# Altium PCB Current Sensor.PcbDoc
Units mil, origin at the board's own origin, x right, y up, seen from the top; angles counter-clockwise.
Board outline 1655 x 1211.8 mil, 4 copper layers (Top Layer, GND, 5V, Bottom Layer), stack 26.556 mil thick; 30 components, 11 nets, 69 pads, 59 vias.
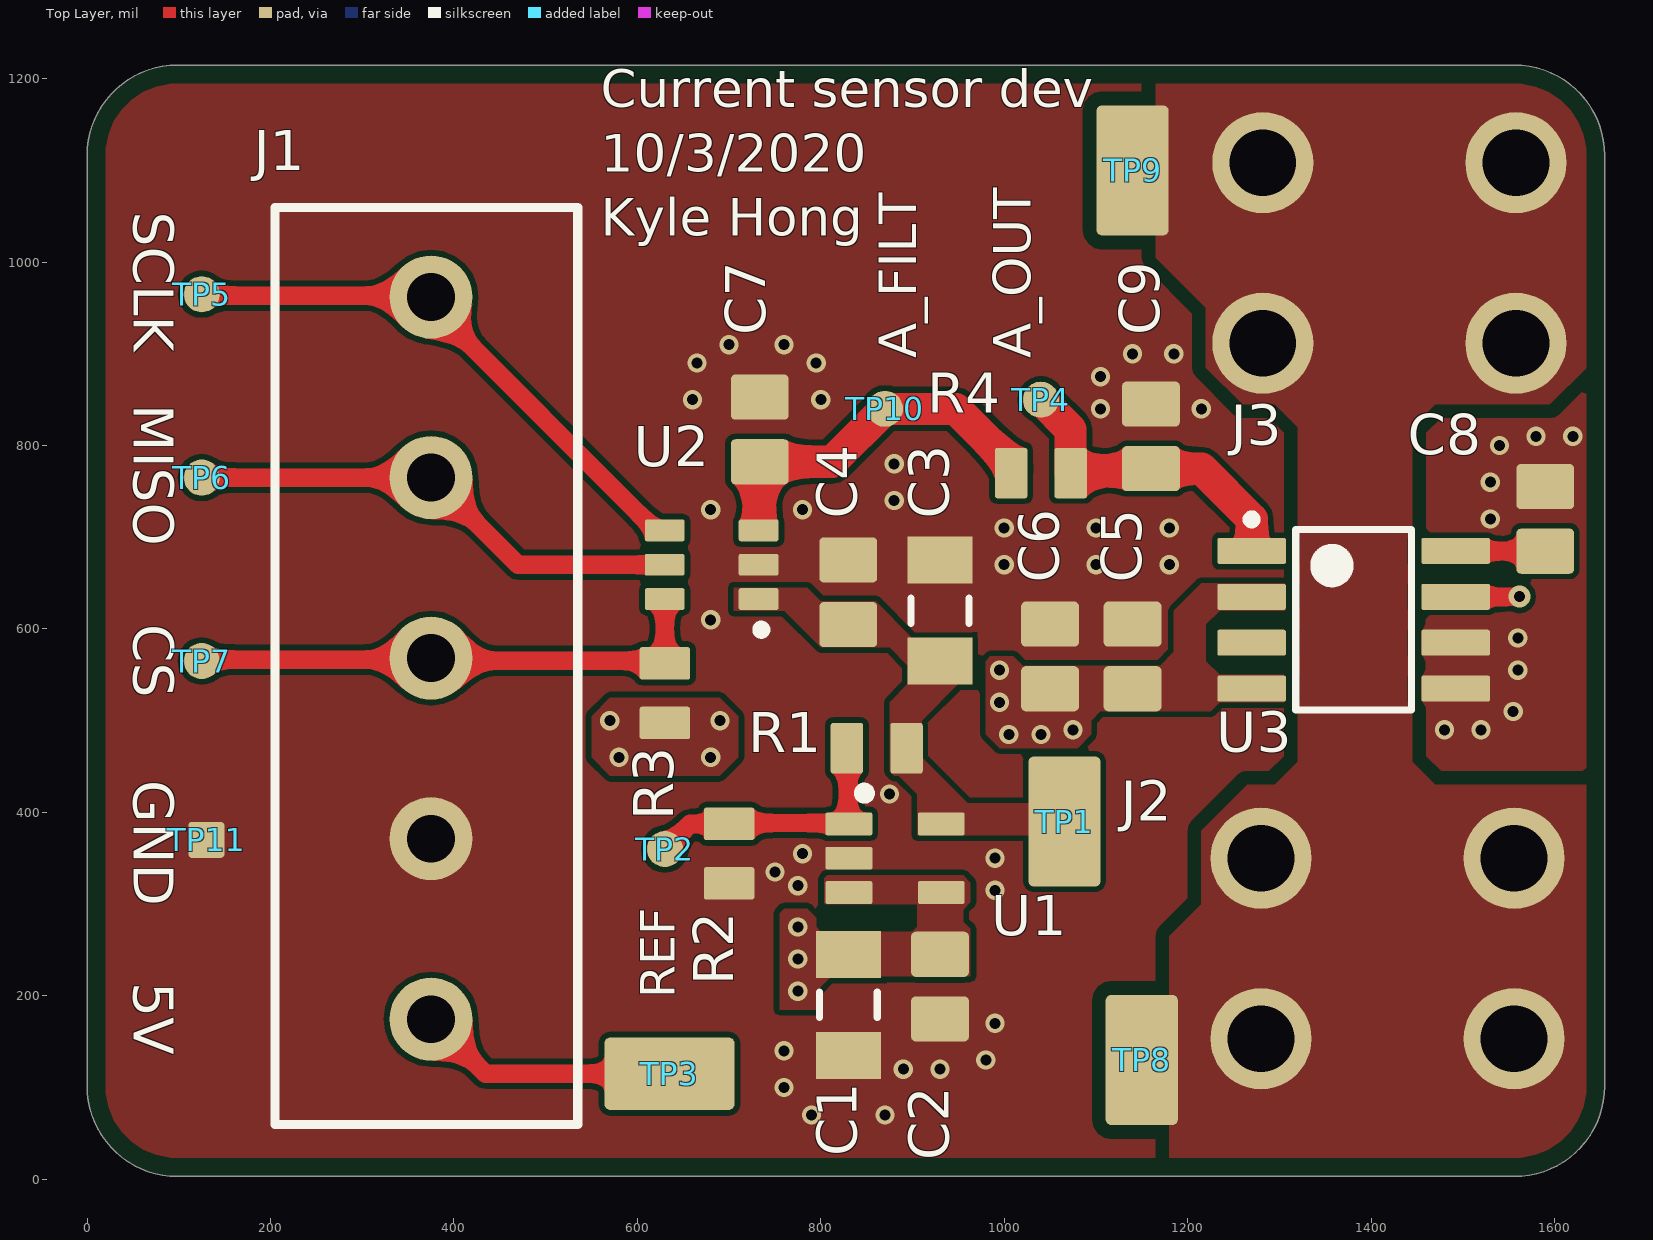
[diagram p0: Top Layer view]
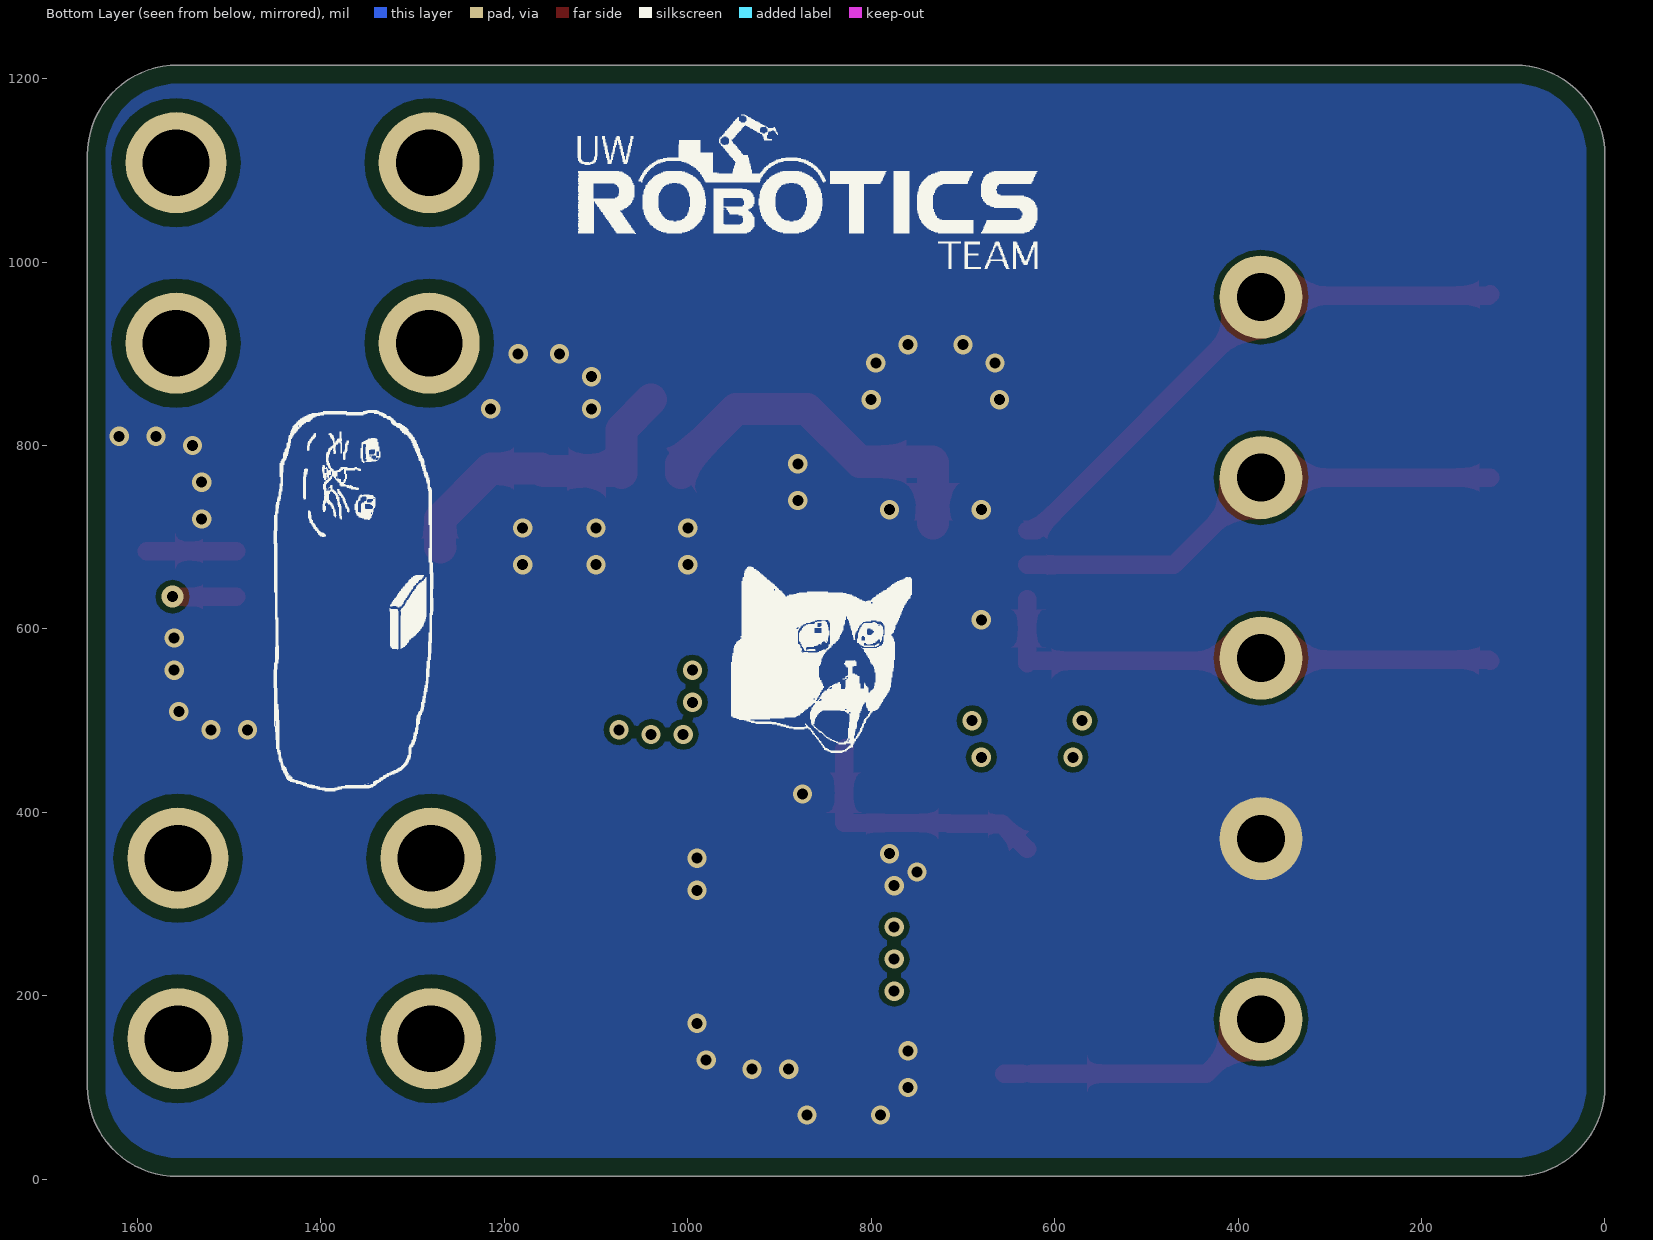
[diagram p1: Bottom Layer view, seen from below]
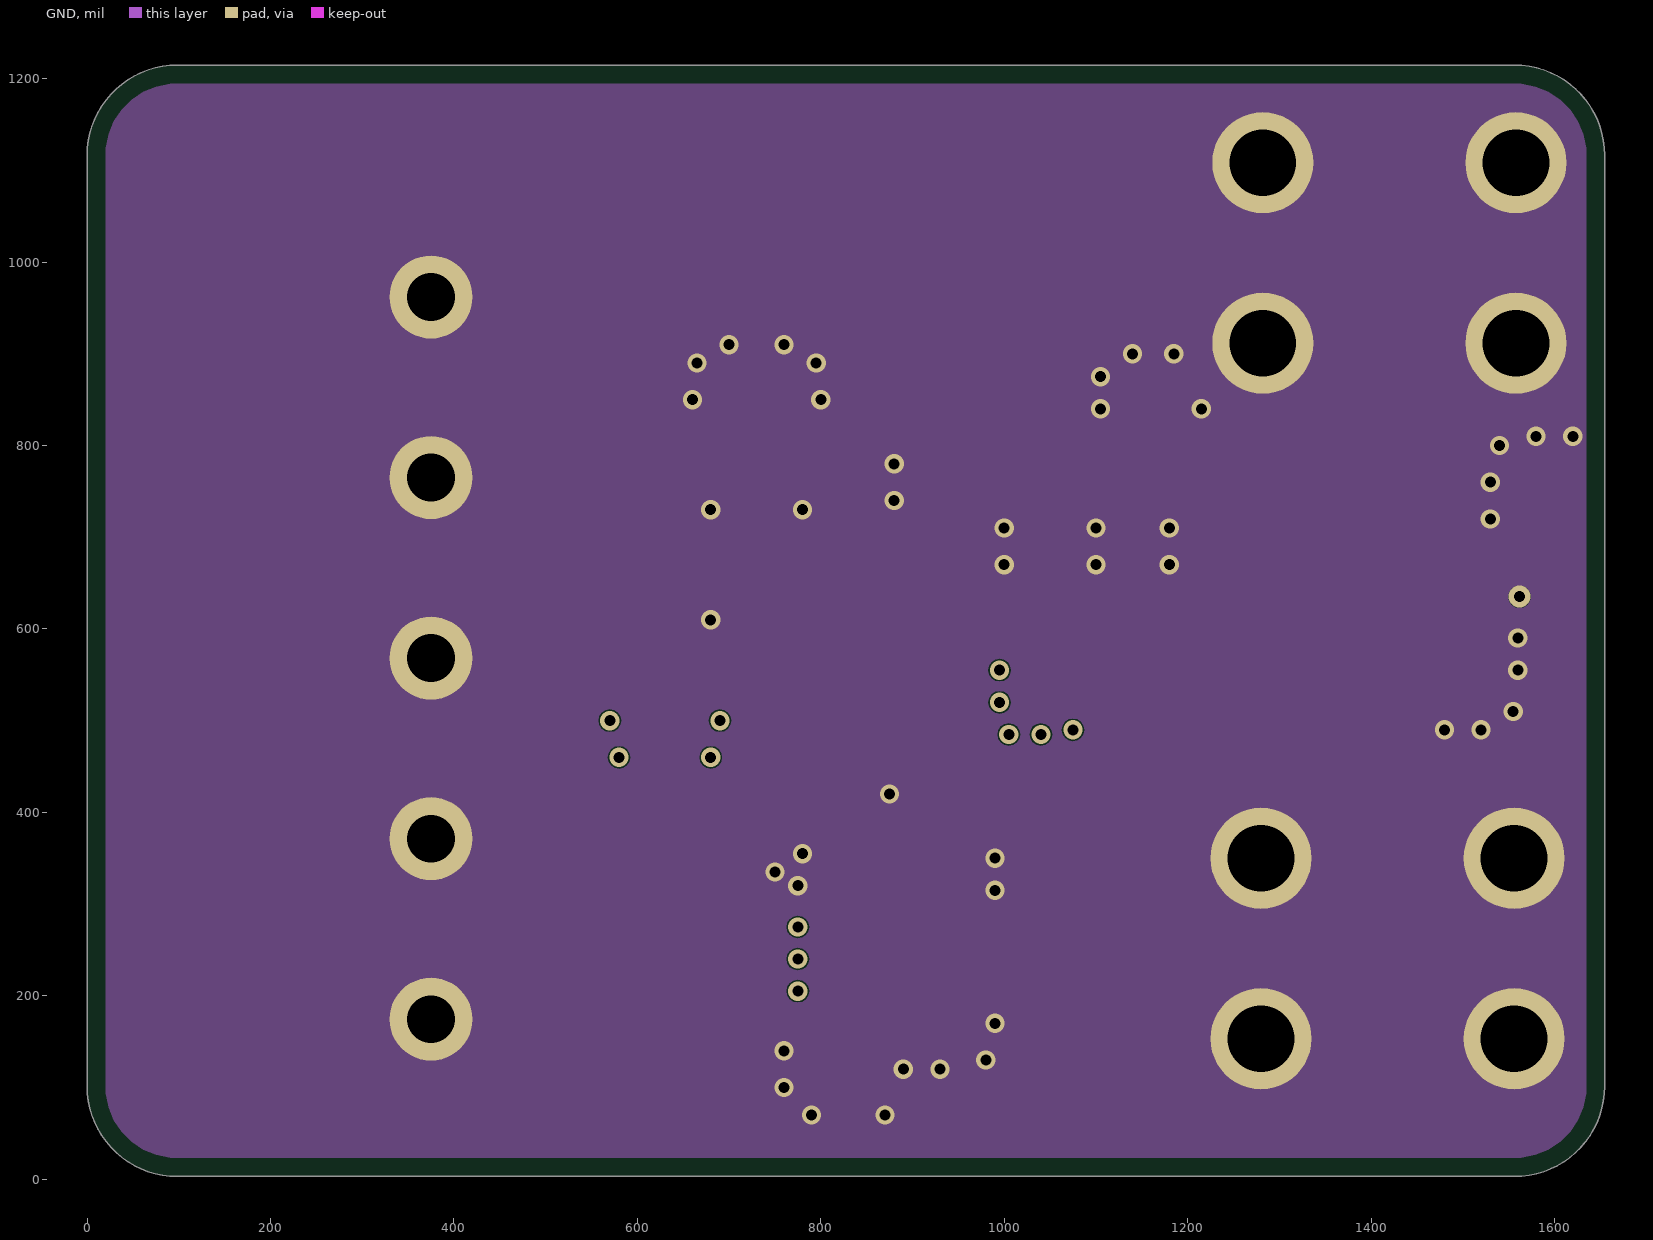
[diagram p2: GND]
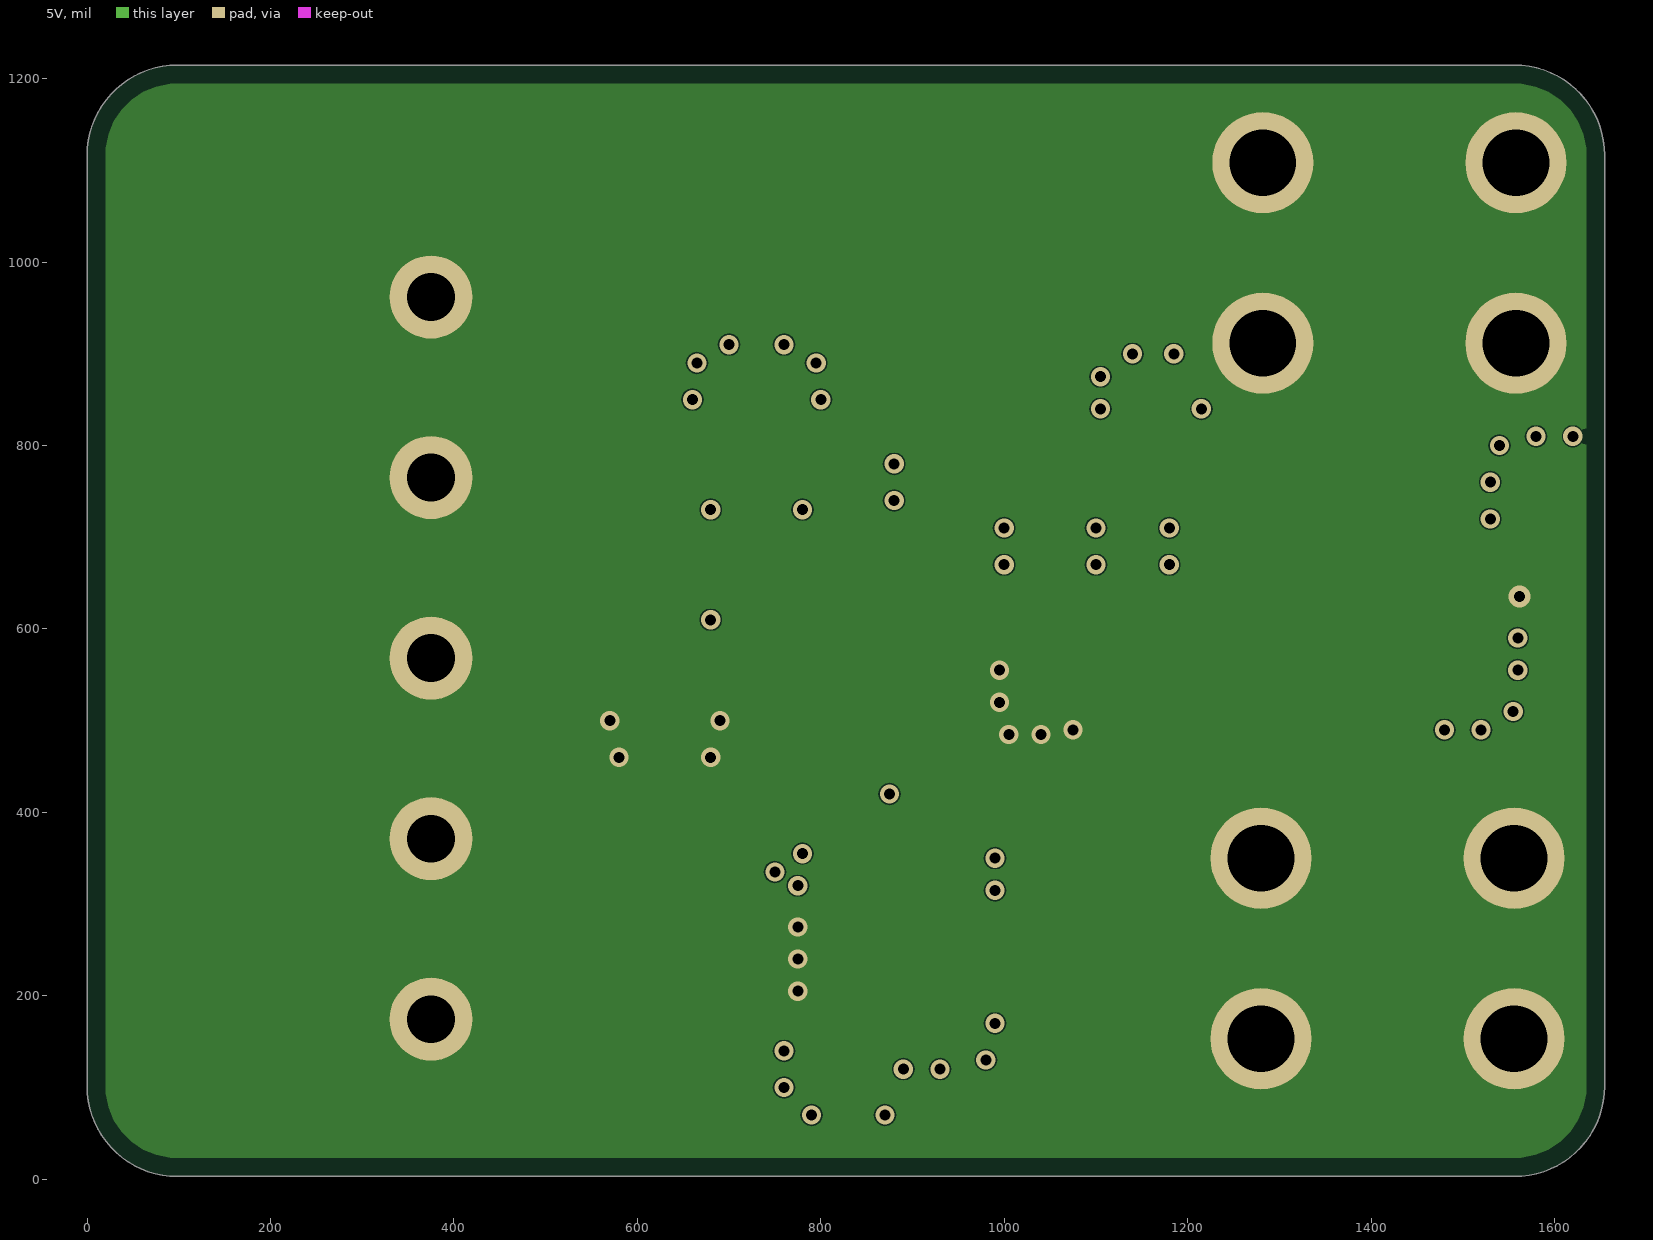
[diagram p3: 5V]
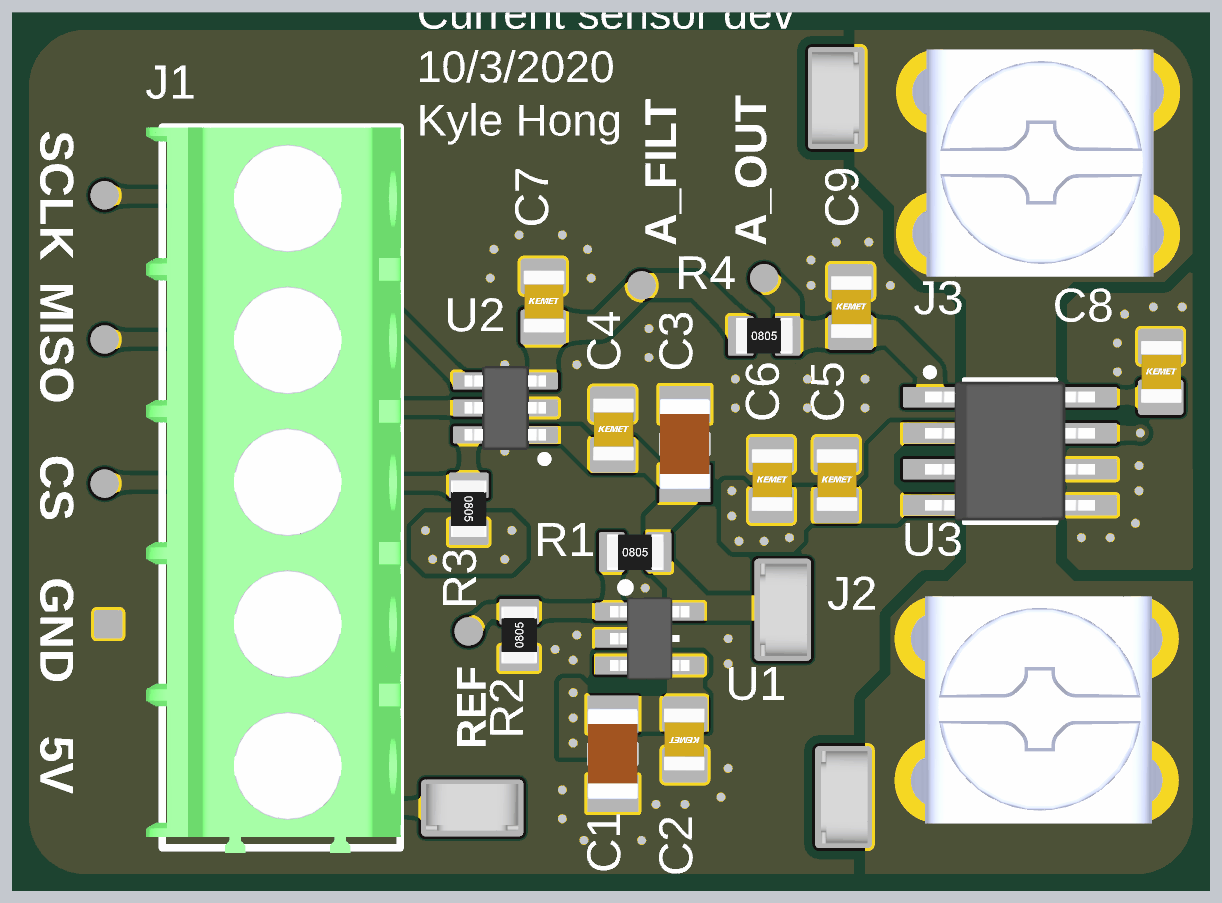
[diagram p4: 3D render of the assembled board from above, using the file's embedded part models]

## Layer stack, top to bottom
Top Solder: solder mask 0.4, Solder Resist, Dk 3.5
Top Layer: signal copper 2.8
Dielectric 2: prepreg 2.8, PP-006, Dk 4.1
GND: signal copper 1.378
Dielectric 1: dielectric 12.6, FR-4, Dk 4.8
5V: signal copper 1.378
Dielectric 3: prepreg 2.8, PP-006, Dk 4.1
Bottom Layer: signal copper 2.8
Bottom Solder: solder mask 0.4, Solder Resist, Dk 3.5

## Board outline
0,101 0,1116.38 cw(c98.43,1116.38) 98.43,1214.8 1556.38,1214.8 cw(c1556.38,1116.38) 1654.8,1116.38 1655,100 1654.8,101.43 cw(c1556.38,101.43) 1556.38,3 98.43,3 cw(c98.43,101.43)

## Design rules (kind name [scope] priority, off if disabled: settings)
BoardOutlineClearance [All] p1: gap=20 ignorepadtopadclearanceinfootprint=FALSE
Clearance "current clearance" [InNet('Current sense line')] p1: gap=15 ignorepadtopadclearanceinfootprint=TRUE
Clearance Clearance_1 [All] p2: gap=6 ignorepadtopadclearanceinfootprint=TRUE
HoleSize [All] p1: absolutevalues=TRUE maxlimit=200 minlimit=1 maxpercent=80.000 minpercent=20.000
MinimumSolderMaskSliver [All] p1: minsoldermaskwidth=6
PolygonConnect "High current" [InNet('Current sense line')] p1: connectstyle=Direct reliefconductorwidth=10 reliefentries=4 polygonreliefangle="90 Angle" airgapwidth=10
PolygonConnect [All] p2: connectstyle=Direct reliefconductorwidth=10 reliefentries=4 polygonreliefangle="90 Angle" airgapwidth=10
RoutingVias [All] p1: holewidth=12 width=24 viastyle="Through Hole" minholewidth=12 minwidth=24 maxholewidth=28 maxwidth=50
SilkToSolderMaskClearance [IsPad] p1: minsilkscreentomaskgap=6 clearancetoexposedcopper=TRUE
SolderMaskExpansion [All] p1: expansion=4 istentingtop=FALSE
Width [All] p1: maxlimit=50 minlimit=6 preferedwidth=6 midlayer1_maxwidth=10 midlayer2_maxwidth=10 minimp=50.000000 maximp=50.000000 favimp=50.000000
27 further rules are at their usual default settings.

## Components (designator, comment, footprint, x,y, rotation, side; value= is the part's Value field where it differs from the comment)
C1 "CAP_1uF_100V_1206" CAPC3216X190X50NL20T25 830,190 r90 top
C2 "0.1μF" CAP2012 930,210 r90 top
C3 "CAP_1uF_100V_1206" CAPC3216X190X50NL20T25 930,620 r270 top
C4 "0.1μF" CAP2012 830,640 r270 top
C5 "CAP_100pF_50V_0805" CAP2012 1140,570 r270 top value=100pF
C6 "0.1μF" CAP2012 1050,570 r270 top
C7 "0.1μF" CAP2012 733.5,817.5 r270 top
C8 "CAP_1000pF_50V_0805" CAP2012 1590,720 r270 top
C9 "CAP_1000pF_50V_0805" CAP2012 1160,810 r270 top
J1 "CON_5M_TERM" 1935190 375,568.15 r90 top
J2 "Screw Terminal 6-32" 7701_KEYSTONE 1417.99,251.57 r90 top
J3 "Screw Terminal 6-32" 7701_KEYSTONE 1420,1010 r90 top
R1 "RES_4.87kΩ_0805" RESC0805(2012)_H 861,470 r0 top
R2 "RES_1.6kΩ_0805" RESC0805(2012)_H 700,355 r90 top
R3 "RES_4.87kΩ_0805" RESC0805(2012)_H 630,530 r270 top
R4 "RES_1.6kΩ_0805" RESC0805(2012)_H 1040,770 r0 top
TP1 "TESTPOINT_SMD_LOOP" S1751-46R 1065.75,390 r90 top
TP2 "TESTPOINT_1MM_CIRCLE" TESTPOINT_CIRCLE_1MM 630,360 r90 top
TP3 "TESTPOINT_SMD_LOOP" S1751-46R 635,115 r180 top
TP4 "TESTPOINT_1MM_CIRCLE" TESTPOINT_CIRCLE_1MM 1040,850 r90 top
TP5 "TESTPOINT_1MM_CIRCLE" TESTPOINT_CIRCLE_1MM 125,965 r90 top
TP6 "TESTPOINT_1MM_CIRCLE" TESTPOINT_CIRCLE_1MM 125,765 r90 top
TP7 "TESTPOINT_1MM_CIRCLE" TESTPOINT_CIRCLE_1MM 125,565 r90 top
TP8 "TESTPOINT_SMD_LOOP" S1751-46R 1150,130 r90 top
TP9 "TESTPOINT_SMD_LOOP" S1751-46R 1140,1100 r270 top
TP10 "TESTPOINT_1MM_CIRCLE" TESTPOINT_CIRCLE_1MM 870,840 r90 top
TP11 "TESTPOINT_1MM_SQUARE" TESTPOINT_SQUARE_1MM 130,370 r90 top
U1 "MAX6037CAUKADJ+T" SOT23-5 881,350 r0 top
U2 "ADCS7476AIMF/NOPB" ADCS747x 681,670 r180 top
U3 "MLX91205KDC-AAL-003-RE" 8-SOIC_M 1381,610 r0 top

## Footprints (in the part's own frame and the unit in brackets; to place one, negate y for a bottom-side part, rotate by r counter-clockwise, add the part's x,y. Pads: shape width x height; smd on the part's side, far side on the other; paste and mask are expansions set on the pad)
8-SOIC_M [mm] "SOIC, 8-Leads, Body 5x4mm, Pitch 1.27mm, IPC Low Density"
  rrect15% 1.9x0.72 smd: 1(-2.825,1.905) 2(-2.825,0.635) 3(-2.825,-0.635) 4(-2.825,-1.905) 5(2.825,-1.905) 6(2.825,-0.635) 7(2.825,0.635) 8(2.825,1.905)
  silkscreen extent -2.95,-2.5 1.6,2.9, body extent -3,-2.45 3,2.45, height 1.63
7701_KEYSTONE [mm] "Through hole screw terminal footprint"
  round 2.8 hole 1.85: 1(-2.5,3.505) 1(-2.5,-3.505) 1(2.5,3.505) 1(2.5,-3.505)
  body extent -4.01,-4.64 3.99,4.49, height 8.2
1935190 [mm]
  round 2.3 hole 1.325: 1(-10,0) 2(-5,0) 3(0,0) 4(5,0) 5(10,0)
  silkscreen extent -12.91,-4.06 12.49,4.32, body extent -13.1,-4.1 12.47,4.9, height 11.41
ADCS747x [mm] "sot-23-6"
  rrect17% 1.1x0.6 smd: 1(-1.3,0.95) 2(-1.3,0) 3(-1.3,-0.95) 4(1.3,-0.95) 5(1.3,0) 6(1.3,0.95)
  silkscreen extent -1.5,1.68 -1.25,1.92, body extent -1.43,-1.48 1.43,1.49, height 0.9
CAP2012 [mm]
  rrect20% 1.25x1.6 smd: 1(-0.895,0) 2(0.895,0)
  body extent -1.1,-0.7 1.1,0.75, height 1.41
CAPC3216X190X50NL20T25 [mm] "Chip Capacitor, 2-Leads, Body 3.20x1.60mm, IPC Medium Density"
  rect 1.3x1.8 smd: 1(-1.4,0) 2(1.4,0)
  silkscreen extent -0.35,-0.8 0.35,0.8, body extent -1.6,-0.9 1.6,0.9, height 1.59
RESC0805(2012)_H [mm] "Chip Resistor, 2-Leads, Body 2.00x1.25mm, IPC High Density"
  rrect15% 0.9x1.4 smd: 1(-0.825,0) 2(0.825,0)
  body extent -1,-0.62 1,0.63, height 0.61
S1751-46R [mm] "SMD LOOP TESTPOINT"
  rrect15% 3.6x2 smd: 1(0,0)
  body extent -1.63,-0.85 1.62,0.8, height 2.01
SOT23-5 [mm]
  rrect15% 1.3x0.63 smd: 1(-1.279,0.95) 2(-1.279,0) 3(-1.279,-0.95) 4(1.279,-0.95) 5(1.279,0.95)
  silkscreen extent -0.99,1.66 -0.71,1.94, body extent -1.4,-1.45 1.4,1.45, height 1.2
TESTPOINT_CIRCLE_1MM [mm]
  round 1 smd: 1(0,0)
TESTPOINT_SQUARE_1MM [mm]
  rrect20% 1x1 smd: 1(0,0)

## Part data
C1 C3: "CAP CER 1UF 100V X7R 1206", Capacitance=1uF, Case/Package=1206, Manufacturer=Murata, Manufacturer Part Number=GCJ31CR72A105KA01L, Max Operating Temperature=125°C, Min Operating Temperature=-55°C, Ratings=AEC-Q200, Supplier Part Number 1=490-16468-1-ND, Tolerance=10%, Voltage Rating=100V, Category="Ceramic Capacitors", ComponentLink1Description=https://psearch.en.murata.com:443/capacitor/product/GCJ31CR72A105KA01%23.pdf?src-supplier=IHS+Markit, ComponentLink1URL=https://psearch.en.murata.com:443/capacitor/product/GCJ31CR72A105KA01%23.pdf?src-supplier=IHS+Markit, ComponentLink2Description=http://search.murata.co.jp/Ceramy/image/img/A01X/G101/ENG/GCJ31CR72A105KA01-01.pdf?src-supplier=Digi-Key, ComponentLink2URL=http://search.murata.co.jp/Ceramy/image/img/A01X/G101/ENG/GCJ31CR72A105KA01-01.pdf?src-supplier=Digi-Key, Features="Soft Termination", Mount="Surface Mount", Packaging="Tape and Reel", Pricing 1="1=0.69000, 10=0.48900, 50=0.37000, 100=0.32230, 500=0.23874, 1000=0.20294 (USD)", RoHS=No, Stock 1=36535, Supplier 1=Digi-Key
C2 C4 C6 C7: library part CAP_0.1uF_50V_0805, "CAP CER 0.1UF 50V X7R 0805", Case Code (Imperial)=0805, Case Code (Metric)=2012, Dielectric=X7R, Manufacturer 1="Murata Electronics", Manufacturer Part Number 1=GCD21BR71H104KA01L, Max Operating Temperature=125°C, Min Operating Temperature=-55°C, Package="0805 (2012 Metric)", Ratings=AEC-Q200, Supplier Part Number 1=490-11955-1-ND, Tolerance=10%, Voltage Rating=50V, Depth=1.25mm, Height=1.25mm, Length=2mm, Mount="Surface Mount", Supplier 1=Digi-Key, Termination=SMD/SMT, Thickness=0.049inch, Width=0.049inch
C5: "CAP CER 100PF 50V C0G/NP0 0805", Case Code (Imperial)=0805, Case Code (Metric)=2012, Dielectric="C0G, NP0", Manufacturer 1=KEMET, Manufacturer Part Number 1=C0805C101J5GACTU, Max Operating Temperature=125°C, Min Operating Temperature=-55°C, Package="0805 (2012 Metric)", Supplier Part Number 1=399-1122-1-ND, Tolerance=5%, Voltage Rating=50V, Mount="Surface Mount", Supplier 1=Digi-Key, Termination=SMD/SMT
C8 C9: "CAP CER 1000pF 50V X7R 0805", Capacitance=1000pF, Case Code (Imperial)=0805, Case Code (Metric)=2012, Dielectric=X7R, Manufacturer 1=Samsung, Manufacturer Part Number 1=CL21B102KBANNNC, Max Operating Temperature=125°C, Min Operating Temperature=-55°C, Package Quantity=4000, Supplier Part Number 1=1276-1020-1-ND, Tolerance=10%, Voltage=50V, Case/Package=0805, Category="Ceramic Capacitors", ComponentLink1Description=https://datasheet.ciiva.com:443/pdfs/VipMasterIC/IC/SEMS/SEMS-S-A0008520814/SEMS-S-A0008520759-1.pdf?src-supplier=IHS+Markit, ComponentLink1URL=https://datasheet.ciiva.com:443/pdfs/VipMasterIC/IC/SEMS/SEMS-S-A0008520814/SEMS-S-A0008520759-1.pdf?src-supplier=IHS+Markit, ComponentLink2Description=https://datasheet.ciiva.com/25802/cl21b102kbannnc-25802496.pdf?src-supplier=Digi-Key, ComponentLink2URL=https://datasheet.ciiva.com/25802/cl21b102kbannnc-25802496.pdf?src-supplier=Digi-Key, ComponentLink3Description=https://datasheet.ciiva.com/26838/getdatasheetpartid-357425-26838638.pdf?src-supplier=Verical, ComponentLink3URL=https://datasheet.ciiva.com/26838/getdatasheetpartid-357425-26838638.pdf?src-supplier=Verical, ComponentLink4Description=https://datasheet.ciiva.com/29199/456076-da-01-en-vs-kondensator-0805-29199069.pdf?src-supplier=Conrad, ComponentLink4URL=https://datasheet.ciiva.com/29199/456076-da-01-en-vs-kondensator-0805-29199069.pdf?src-supplier=Conrad, Contact Plating=Tin, Depth=1.25mm, Height=0.65mm, Length=2mm, Material=Ceramic, Mount="Surface Mount", Packaging="Tape and Reel", Pricing 1="1=0.10000, 10=0.04200, 50=0.02300, 100=0.01880, 500=0.01340, 1000=0.01053 (USD)", Radiation Hardening=No, RoHS=Yes, Stock 1=974042, Supplier 1=Digi-Key, Thickness=0.03inch, Voltage Rating=50V, Width=0.049inch
J1: "Barrier Strip Terminal Block, 17.5A, 1.5mm2, 1 Row(s), 1 Deck(s)", Color=Green, Current=18A, Current Rating=17.5A, Flammability Rating="UL94 V-0", Manufacturer 1="Phoenix Contact", Manufacturer Part Number 1=1935190, Max Current Rating=16A, Max Supply Voltage=250V, Package Quantity=100, Supplier Part Number 1=277-1580-ND, Voltage=300V, Voltage Rating (DC)=320V, Approvals=UL,VDE,CB, Category="Terminal Blocks", ComponentLink1Description=https://datasheet.ciiva.com:443/pdfs/VipMasterIC/IC/PCON/PCONS16609/PCONS13702-1.pdf?src-supplier=IHS+Markit, ComponentLink1URL=https://datasheet.ciiva.com:443/pdfs/VipMasterIC/IC/PCON/PCONS16609/PCONS13702-1.pdf?src-supplier=IHS+Markit, ComponentLink2Description=https://datasheet.ciiva.com/823/combicon20compact205-0mm20series-823776.pdf?src-supplier=Digi-Key, ComponentLink2URL=https://datasheet.ciiva.com/823/combicon20compact205-0mm20series-823776.pdf?src-supplier=Digi-Key, ComponentLink3Description=https://datasheet.ciiva.com/16047/1935190-16047253.pdf?src-supplier=Onlinecomponents.com, ComponentLink3URL=https://datasheet.ciiva.com/16047/1935190-16047253.pdf?src-supplier=Onlinecomponents.com, ComponentLink4Description=https://datasheet.ciiva.com/26840/getdatasheetpartid-745201-26840566.pdf?src-supplier=Verical, ComponentLink4URL=https://datasheet.ciiva.com/26840/getdatasheetpartid-745201-26840566.pdf?src-supplier=Verical, Contact Material=Copper,Tin, Depth=9mm, Height=11.3mm, Housing Color=Green, Housing Material=Polyamide, Insulation Material=Nylon, Lead Free="Lead Free", Length=9mm, Mount="Through Hole", Number of Circuits=5, Number of Contacts=5, Number of Levels=1, Number of Pins=5, Number of Poles=1, Number of Positions=5, Number of Positions Per Level=5, Number of Rows=1, Orientation=Straight, Packaging=Bulk, Pitch=5mm, Pricing 1="1=1.01000, 10=0.97000, 50=0.94380, 100=0.88200, 250=0.81144, 500=0.74976 (USD)", Radiation Hardening=No, REACH SVHC=Unknown, RoHS=Yes, Stock 1=5445, Stripping Length=5mm, Supplier 1=Digi-Key, Termination=Screw, Voltage Rating=250V, Weight=0.179192oz, Width=25mm, Wire Gauge (Max)=26AWG, Wire Gauge (Min)=12AWG, Wire/Cable Gauge=26AWG
J2 J3: library part SCREW_TERMINAL_1_POS_6_32, "TERM W/ASSEMBLD SCREW VERT PCMNT", Color=Silver, Current Rating=15A, Manufacturer 1="Keystone Electronics", Manufacturer Part Number 1=7701, Supplier Part Number 1=36-7701-ND, Contact Material=Brass, Contact Plating=Tin,Nickel, Depth=7.87mm, Diameter=0.31inch, Gender=Male, Height=0.44inch, Insulation=Non-Insulated, Length=7.87mm, Material=Brass,Tin, Max Current Rating=15A, Mount="Through Hole", Number of Contacts=1, Number of Pins=4, Number of Ports=1, Number of Terminals=4, Orientation=Straight, REACH SVHC="No SVHC", Supplier 1=Digi-Key, Terminal Material=Brass, Termination=Solder
R1 R3: "RES SMD 4.87k OHM 0.1% 1/8W 0805", Case Code (Imperial)=0805, Case Code (Metric)=2012, Manufacturer 1=Panasonic, Manufacturer Part Number 1=ERA6AEB4871V, Max Operating Temperature=155°C, Max Power Dissipation=125mW, Min Operating Temperature=-55°C, Package Quantity=1, Resistance=4.87kΩ, Resistor Type="Thin Film,Metal Film", Supplier Part Number 1=P4.87KDACT-ND, Temperature Coefficient=25ppm/°C, Tolerance=0.1%, Voltage Rating=100V, Case/Package=0805, Category="Chip SMD Resistors", ComponentLink1Description=https://datasheet.ciiva.com:443/pdfs/VipMasterIC/IC/PANA/PANA-S-A0009459258/PANA-S-A0009459258-1.pdf?src-supplier=IHS+Markit, ComponentLink1URL=https://datasheet.ciiva.com:443/pdfs/VipMasterIC/IC/PANA/PANA-S-A0009459258/PANA-S-A0009459258-1.pdf?src-supplier=IHS+Markit, ComponentLink2Description=https://datasheet.ciiva.com/11810/0900766b80eb1d8c-11810265.pdf?src-supplier=RSComponents, ComponentLink2URL=https://datasheet.ciiva.com/11810/0900766b80eb1d8c-11810265.pdf?src-supplier=RSComponents, ComponentLink3Description=https://datasheet.ciiva.com/26335/459399-da-01-en-widerstand-0805-era-26335821.pdf?src-supplier=Conrad, ComponentLink3URL=https://datasheet.ciiva.com/26335/459399-da-01-en-widerstand-0805-era-26335821.pdf?src-supplier=Conrad, ComponentLink4Description=https://datasheet.ciiva.com/5972/485442-5972630.pdf?src-supplier=Farnell, ComponentLink4URL=https://datasheet.ciiva.com/5972/485442-5972630.pdf?src-supplier=Farnell, ComponentLink5Description=https://datasheet.ciiva.com/17213/aoa0000ce26-17213081.pdf?src-supplier=Avnet+Europe, ComponentLink5URL=https://datasheet.ciiva.com/17213/aoa0000ce26-17213081.pdf?src-supplier=Avnet+Europe, ComponentLink6Description=https://datasheet.ciiva.com/9195/aoa0000ce26-9195612.pdf?src-supplier=Avnet, ComponentLink6URL=https://datasheet.ciiva.com/9195/aoa0000ce26-9195612.pdf?src-supplier=Avnet, ComponentLink7Description=https://datasheet.ciiva.com/5972/485442-5972623.pdf?src-supplier=Farnell, ComponentLink7URL=https://datasheet.ciiva.com/5972/485442-5972623.pdf?src-supplier=Farnell, Contact Plating=Tin, Depth=1.25mm, Features="Automotive AEC-Q200", Height=0.5mm, Lead Free="Lead Free", Length=2mm, Mount="Surface Mount", Number of Pins=2, Number of Terminations=2, Packaging="Tape and Reel", Power Rating=125mW, Pricing 1="1=0.31000, 10=0.26200, 100=0.10230, 1000=0.04284, 2500=0.03927 (USD)", Radiation Hardening=No, REACH SVHC="No SVHC", RoHS=Yes, Stock 1=10532, Supplier 1=Digi-Key, Termination=Solder, Voltage Rating (DC)=100V, Width=1.25mm
R2 R4: "RES SMD 1.6K OHM 0.1% 1/4W 0805", Case Code (Imperial)=0805, Case Code (Metric)=2012, Manufacturer 1=Panasonic, Manufacturer Part Number 1=ERJ-PB6B1601V, Max Operating Temperature=155°C, Max Power Dissipation=250mW, Min Operating Temperature=-55°C, Resistance=1.6kΩ, Resistor Type="Thick Film", Supplier Part Number 1=P20615CT-ND, Temperature Coefficient=50ppm/°C, Tolerance=0.1%, Case/Package=0805, Category="Chip SMD Resistors", ComponentLink1Description=https://industrial.panasonic.com/sa/system/files/data/download/catalog/id_fixed-resistors_e_2.pdf?src-supplier=Digi-Key, ComponentLink1URL=https://industrial.panasonic.com/sa/system/files/data/download/catalog/id_fixed-resistors_e_2.pdf?src-supplier=Digi-Key, Features="Automotive AEC-Q200", Height - Seated (Max)=0.028inch, Length=0.079inch, Number of Terminations=2, Packaging="Tape and Reel", Pricing 1="1=0.33000, 10=0.27800, 25=0.20240, 50=0.14680, 100=0.10880, 250=0.08348, 500=0.06578, 1000=0.04554 (USD)", RoHS=Yes, Stock 1=10332, Supplier 1=Digi-Key, Width=0.049inch
TP1 TP3 TP8 TP9: "PC TEST POINT SMD", Color=Natural, Manufacturer 1=Harwin, Manufacturer Part Number 1=S1751-46R, Package Quantity=2500, Supplier Part Number 1=952-1478-1-ND, Category="Terminal Blocks", ComponentLink1Description=https://datasheet.ciiva.com:443/pdfs/VipMasterIC/IC/HRWN/HRWN-S-A0002541722/HRWN-S-A0004513972-1.pdf?src-supplier=IHS+Markit, ComponentLink1URL=https://datasheet.ciiva.com:443/pdfs/VipMasterIC/IC/HRWN/HRWN-S-A0002541722/HRWN-S-A0004513972-1.pdf?src-supplier=IHS+Markit, ComponentLink2Description=https://datasheet.ciiva.com/5224/2010page161-58228-5224784.pdf?src-supplier=Mouser, ComponentLink2URL=https://datasheet.ciiva.com/5224/2010page161-58228-5224784.pdf?src-supplier=Mouser, ComponentLink3Description=https://datasheet.ciiva.com/22631/1688119-22631153.pdf?src-supplier=Element14, ComponentLink3URL=https://datasheet.ciiva.com/22631/1688119-22631153.pdf?src-supplier=Element14, ComponentLink4Description=https://datasheet.ciiva.com/2917/s1751-2917604.pdf?src-supplier=Digi-Key, ComponentLink4URL=https://datasheet.ciiva.com/2917/s1751-2917604.pdf?src-supplier=Digi-Key, ComponentLink5Description=https://datasheet.ciiva.com/1462/1693781-1462652.pdf?src-supplier=Farnell, ComponentLink5URL=https://datasheet.ciiva.com/1462/1693781-1462652.pdf?src-supplier=Farnell, ComponentLink6Description=https://datasheet.ciiva.com/1454/1693781-1454941.pdf?src-supplier=Element14, ComponentLink6URL=https://datasheet.ciiva.com/1454/1693781-1454941.pdf?src-supplier=Element14, Contact Material="Copper,Copper Alloy", Contact Plating=Tin, Depth=2mm, Height=2mm, Length=3.25mm, Material="Brass,Copper Alloy", Mount="Surface Mount", Number of Contacts=1, Number of Ports=1, Orientation=Straight, Packaging="Tape and Reel", Plating=Tin, Pricing 1="1=0.29000, 10=0.27700, 25=0.23760, 50=0.20200, 100=0.19400, 250=0.17424, 500=0.16632, 1000=0.13860 (USD)", Radiation Hardening=No, REACH SVHC="No SVHC", RoHS=Yes, Stock 1=159143, Supplier 1=Digi-Key, Termination=Solder, Width=1.65mm
TP2 TP4 TP5 TP6 TP7 TP10: "TESTPOINT 1MM CIRCLE"
TP11: "TESTPOINT 1MM SQUARE"
U1: "Three Terminal Voltage Reference, 1 Output, Trim/Adjustable, BICMOS, PDSO5", Case/Package=SOT-23-5, Manufacturer 1=Maxim, Max Input Voltage=6V, Max Operating Temperature=125°C, Max Output Current=5mA, Max Output Voltage=5V, Min Operating Temperature=-40°C, Min Output Voltage=1.184V, Operating Supply Current=250uA, Package Quantity=2500, Supplier Part Number 1=MAX6037CAUKADJ+TCT-ND, Temperature Coefficient=50ppm/°C, Tolerance=0.5%, Category="Voltage References", ComponentLink1Description=https://datasheet.ciiva.com:443/pdfs/VipMasterIC/IC/MAXM/MAXMS08662/MAXMS08662-1.pdf?src-supplier=IHS+Markit, ComponentLink1URL=https://datasheet.ciiva.com:443/pdfs/VipMasterIC/IC/MAXM/MAXMS08662/MAXMS08662-1.pdf?src-supplier=IHS+Markit, ComponentLink2Description=https://datasheet.ciiva.com/2008/max6037-max6037c-2008594.pdf?src-supplier=Digi-Key, ComponentLink2URL=https://datasheet.ciiva.com/2008/max6037-max6037c-2008594.pdf?src-supplier=Digi-Key, ComponentLink3Description=https://datasheet.ciiva.com/2008/max6037-max6037c-2008595.pdf?src-supplier=Digi-Key, ComponentLink3URL=https://datasheet.ciiva.com/2008/max6037-max6037c-2008595.pdf?src-supplier=Digi-Key, ComponentLink4Description=https://datasheet.ciiva.com/2008/max6037-max6037c-2008596.pdf?src-supplier=Digi-Key, ComponentLink4URL=https://datasheet.ciiva.com/2008/max6037-max6037c-2008596.pdf?src-supplier=Digi-Key, Lead Free="Lead Free", Manufacturer Part Number 1=MAX6037CAUKADJ+T, Mount="Surface Mount", Number of Channels=1, Number of Pins=5, Output Current=5mA, Output Type=Adjustable, Output Voltage=5V, Packaging="Tape and Reel", Pricing 1="1=2.52000, 10=2.26600, 25=2.14200, 100=1.76120, 250=1.58032, 500=1.54700 (USD)", Quiescent Current=250uA, Radiation Hardening=No, REACH SVHC=Unknown, Reference Type=Series,Adjustable, Reference Voltage=5V, RoHS=Yes, Stock 1=1921, Supplier 1=Digi-Key
U2: "1-Channel Single ADC SAR 1Msps 12-bit Serial 6-Pin SOT-23 T/R", Case/Package=SOT-23, Manufacturer 1="TI National Semiconductor", Max Operating Temperature=125°C, Max Supply Voltage=5.25V, Min Operating Temperature=-40°C, Min Supply Voltage=2.7V, Nominal Supply Current=2mA, Operating Supply Voltage=5V, Package Quantity=1000, Power Consumption=2mW, Supplier Part Number 1=ADCS7476AIMF/NOPBCT-ND, Category="Analog to Digital Converters (ADCs)", Conversion Rate=1000KS/s, Height=1.02mm, Integral Nonlinearity (INL)=-1.1LSB, Interface=SPI,Serial, Lead Free="Lead Free", Length=2.92mm, Manufacturer Part Number 1=ADCS7476AIMF/NOPB, Mount="Surface Mount", Number of A/D Converters=1, Number of Analog Inputs=1, Number of Bits=12, Number of Channels=1, Number of Converters=1, Number of Elements=1, Number of Inputs=1, Number of Pins=6, Packaging="Tape and Reel", Polarity=Unipolar, Pricing 1="1=3.31000, 10=2.97500, 25=2.81240, 100=2.31250, 250=2.07500, 500=2.00000 (USD)", Radiation Hardening=No, REACH SVHC="No SVHC", Resolution=12b, RoHS=Yes, Sampling Rate=1MS/s, Signal to Noise Ratio (SNR)=72.5dB, Stock 1=18495, Supplier 1=Digi-Key, Width=1.6mm
U3: "Analog Circuit, 1 Func, PDSO8", Case/Package=SOIC, Frequency=100kHz, Manufacturer 1=Melexis, Max Operating Temperature=150°C, Max Supply Current=16mA, Min Operating Temperature=-40°C, Nominal Supply Current=11mA, Operating Supply Voltage=5.5V, Output Current=1mA, Package Quantity=1, Supplier Part Number 1=MLX91205KDC-AAL-003-RECT-ND, Accuracy=2%, Category="Current Sensors", ComponentLink1Description=https://datasheet.ciiva.com:443/pdfs/VipMasterIC/IC/MELE/MELES00639/MELES00639-1.pdf?src-supplier=IHS+Markit, ComponentLink1URL=https://datasheet.ciiva.com:443/pdfs/VipMasterIC/IC/MELE/MELES00639/MELES00639-1.pdf?src-supplier=IHS+Markit, ComponentLink2Description=https://datasheet.ciiva.com/18494/mlx91205-datasheet-18494742.pdf?src-supplier=Digi-Key, ComponentLink2URL=https://datasheet.ciiva.com/18494/mlx91205-datasheet-18494742.pdf?src-supplier=Digi-Key, ComponentLink3Description=https://datasheet.ciiva.com/18494/mlx91205-datasheet-18494744.pdf?src-supplier=Digi-Key, ComponentLink3URL=https://datasheet.ciiva.com/18494/mlx91205-datasheet-18494744.pdf?src-supplier=Digi-Key, ComponentLink4Description=https://datasheet.ciiva.com/16462/mlx91205-datasheet-16462839.pdf?src-supplier=Future+Electronics, ComponentLink4URL=https://datasheet.ciiva.com/16462/mlx91205-datasheet-16462839.pdf?src-supplier=Future+Electronics, ComponentLink5Description=https://datasheet.ciiva.com/18494/mlx91205-datasheet-18494743.pdf?src-supplier=Digi-Key, ComponentLink5URL=https://datasheet.ciiva.com/18494/mlx91205-datasheet-18494743.pdf?src-supplier=Digi-Key, Lead Free="Lead Free", Linearity=0.5%, Manufacturer Part Number 1=MLX91205KDC-AAL-003-RE, Mount="Surface Mount", Number of Channels=1, Number of Pins=8, Operating Supply Current=11mA, Packaging="Tape and Reel", Polarity=Bidirectional, Pricing 1="1=2.27000, 25=2.17720, 100=2.12400 (USD)", Response Time=8us, RoHS=Yes, Stock 1=10592, Supplier 1=Digi-Key

## Via types
v1: diameter 21, hole 12, Top Layer to Bottom Layer, tented both sides, 58 vias
v2: diameter 24, hole 12, Top Layer to Bottom Layer, tented both sides, 1 vias

## Nets (pads, with @x,y where several pads share a name; then routed paths per layer and width w, separated by ;. In a path a pad name is that pad's centre, name@x,y a point inside that pad or via, vN(x,y) a via of type N, cw(c..) or ccw(c..) an arc to the next point about the centre after c; other vN are vias at no path point)
5V: C1.2 C2.2 C5.2 C6.2 J1.1 R3.2 TP3.1 U1.3 U1.4 U3.2 U3.4 U3.7 | length 364.3
  Top Layer w20: J1.1 434.45,115 TP3.1@625,115 ; TP3.1 TP3.1@655,115 ; U3.7 1561.73,635 v2(1561.83,635.11)
  other v1: 775,205 775,240 775,275 580,460 680,460 1005,485 1040,485 1075,490 570,500 690,500 995,520 995,555
ADC_IN: C3.2 C4.2 R1.2 TP1.1 U1.5 U2.1
Analog_filtered: C7.2 R4.1 TP10.1 U2.3 | length 400.2
  Top Layer w35: U2.3@732.84,715 732.84,781.6 C7.2 812.26,782.26 TP10.1 947.36,840 1007.52,779.84 R4.1
Analog_out: C9.2 R4.2 TP4.1 U3.1 | length 346.8
  Top Layer w35: TP4.1 1072.48,817.52 R4.2 1074.86,772.38 1157.62,772.38 C9.2 1215.24,774.76 1270,720 1270,689.17 U3.1@1269.78,688.95
"Current sense line": J2.1 J3.1 TP8.1 TP9.1
GND: C1.1 C2.1 C3.1 C4.1 C5.1 C6.1 C7.1 C8.1 C9.1 J1.2 R2.1 TP11.1 U1.2 U2.2 U3.5 U3.6
  other v1: 790,70 870,70 760,100 890,120 930,120 980,130 760,140 990,170 990,315 775,320 750,335 990,350 780,355 875,420 1480,490 1520,490 1555,510 1560,555 1560,590 680,610 1000,670 1100,670 1180,670 1000,710 1100,710 1180,710 1530,720 680,730 780,730 880,740 1530,760 880,780 1540,800 1580,810 1620,810 1105,840 1215,840 660,850 800,850 1105,875 665,890 795,890 1140,900 1185,900 700,910 760,910
NetC8_2: C8.2 U3.8 | length 97.9
  Top Layer w20: U3.8 1492.34,684.88 1589.88,684.88 C8.2
NetJ1_3: J1.3 R3.1 TP7.1 U2.6 | length 578.7
  Top Layer w20: TP7.1 126.57,566.57 373.43,566.57 J1.3 377.83,565.32 627.17,565.32 R3.1@629.91,562.57 ; U2.6 629.91,632.51 R3.1@629.91,562.57 ; R3.1 R3.1@629.91,562.57
NetJ1_4: J1.4 TP6.1 U2.5 | length 544.2
  Top Layer w20: TP6.1 J1.4 470,670 U2.5
NetJ1_5: J1.5 TP5.1 U2.4 | length 617.1
  Top Layer w20: TP5.1 126.57,963.43 373.43,963.43 J1.5 375,952.38 619.98,707.4 U2.4
NetR1_1: R1.1 R2.2 TP2.1 U1.1 | length 292.9
  Top Layer w20: TP2.1 657.48,387.48 R2.2@715,387.48 ; R2.2@715,388.46 829.58,388.46 829.58,468.94 R1.1
pads on no net: U3.3

## Polygon pours and split planes (outlines as drawn)
GND on Top Layer "GND_L01_P014" (solid, pour order 14): -100,-80 1760,-80 1760,1240 1640,1360 -100,1360
"Current sense line" on Top Layer "CURRENT_SENSE_LINE_L01_P007" (solid, pour order 7): 1180,-10 1180,265 1215,300 1215,380 1265,430 1295,430 1320,455 1320,820 1295,845 1260,845 1220,885 1220,950 1165,1005 1165,1255 1685,1255 1690,1260 1690,930 1680,930 1595,845 1470,845 1445,820 1445,455 1470,430 1655,430 1705,380 1705,-10
5V on Top Layer "5V_L01_P011" (solid, pour order 11): 1080,470 995,470 980,485 980,565 985,570 1010,570 1020,560 1170,560 1185,575 1185,620 1215,650 1310,650 1310,620 1235,620 1220,605 1220,565 1235,550 1305,550 1305,520 1235,520 1225,510 1105,510 1095,500 1095,485
5V on Top Layer "5V_L01_P003" (solid, pour order 3): 550,505 570,525 690,525 710,505 710,460 690,440 570,440 550,460
ADC_IN on Top Layer "ADC_IN_L01_P012" (solid, pour order 12): 1095,375 905,375 905,420 885,440 880,440 875,445 875,520 895,540 895,560 875,580 800,580 760,620 705,620 705,645 785,645 800,630 860,630 900,590 965,590 965,540 950,540 910,500 910,460 960,410 1095,410
5V on Top Layer "5V_L01_P013" (solid, pour order 13): 755,185 755,290 760,295 785,295 795,285 795,275 800,270 900,270 905,275 905,300 805,300 803.85,301.15 803.85,328.09 806.92,331.15 955.08,331.15 963.1,323.14 963.1,302.06 955.08,294.04 955.08,280.96 963.1,272.95 963.1,221.29 811.29,221.29 795,205 795,185
5V on 5V "5V_L03_P006" (solid, pour order 6): -100,1360 1670,1360 1800,1230 1800,-90 -70,-90 -100,-60
GND on Bottom Layer "GND_L04_P001" (solid, pour order 1): -120,-100 1780,-100 1820,-60 1820,1260 1740,1340 -120,1340
GND on GND "GND_L02_P005" (solid, pour order 5): -100,1360 -90,1350 1660,1350 1800,1210 1800,-80 -30,-80 -100,-10

## Silkscreen, mask and mechanical layers (free items; w line width, h text height)
Top Overlay:
  text "SCLK" at 35.88,1055 h75 r270
  text "Current sensor dev / 10/3/2020 / Kyle Hong" at 560,1015 h70
  text "A_FILT" at 917.64,895 h70 r90
  text "A_OUT" at 1042.64,895 h70 r90
  text "MISO" at 35.88,845 h75 r270
  text "CS" at 35.88,605 h75 r270
  text "GND" at 35.88,435 h75 r270
  text "5V" at 35.88,215 h75 r270
  text "REF" at 653.46,197.1 h65 r90
Bottom Overlay:
  drawing of 34 lines, arcs and shapes, not listed
Board Outline:
  lines w7: 0,101 0,1116.38 cw(c98.43,1116.38) 98.43,1214.8 1555,1214.8 ; 0,101.43 ccw(c98.43,101.43) 98.43,3 1556,3 ; 1556.38,3 ccw(c1556.38,101.43) 1654.8,101.43 ; 1556.38,1214.8 cw(c1556.38,1116.38) 1654.8,1116.38 1655,100
Mechanical 4:
  lines w10: -0.5,-472.93 -0.5,-452.93 ; 59.5,-482.93 -0.5,-462.93 ; 59.5,-442.93 -0.5,-462.93 ; 396.02,-462.93 -0.5,-462.93 ; 1177.78,-462.93 1574.3,-462.93 ; 1514.3,-482.93 1574.3,-462.93 ; 1514.3,-442.93 1574.3,-462.93 ; 1574.3,-472.93 1574.3,-452.93 ; 1652.73,-304.5 1672.73,-364.5 ; 1652.73,1150.3 1672.73,1210.3 ; 1662.73,-364.5 1682.73,-364.5 ; 1662.73,1210.3 1682.73,1210.3 ; 1672.73,32.02 1672.73,-364.5 ; 1672.73,813.78 1672.73,1210.3 ; 1692.73,-304.5 1672.73,-364.5 ; 1692.73,1150.3 1672.73,1210.3
  text "1574.803 (mil)" at 1708.72,42.02 h60 r90
  text "1574.803 (mil)" at 406.02,-498.92 h60